# Altium PCB T90MProbojV2.PcbDoc
Units mil, origin at the board's own origin, x right, y up, seen from the top; angles counter-clockwise.
Board outline 5907 x 3150 mil, 2 copper layers (Top Layer, Bottom Layer); 48 components, 36 nets, 183 pads, 31 vias.
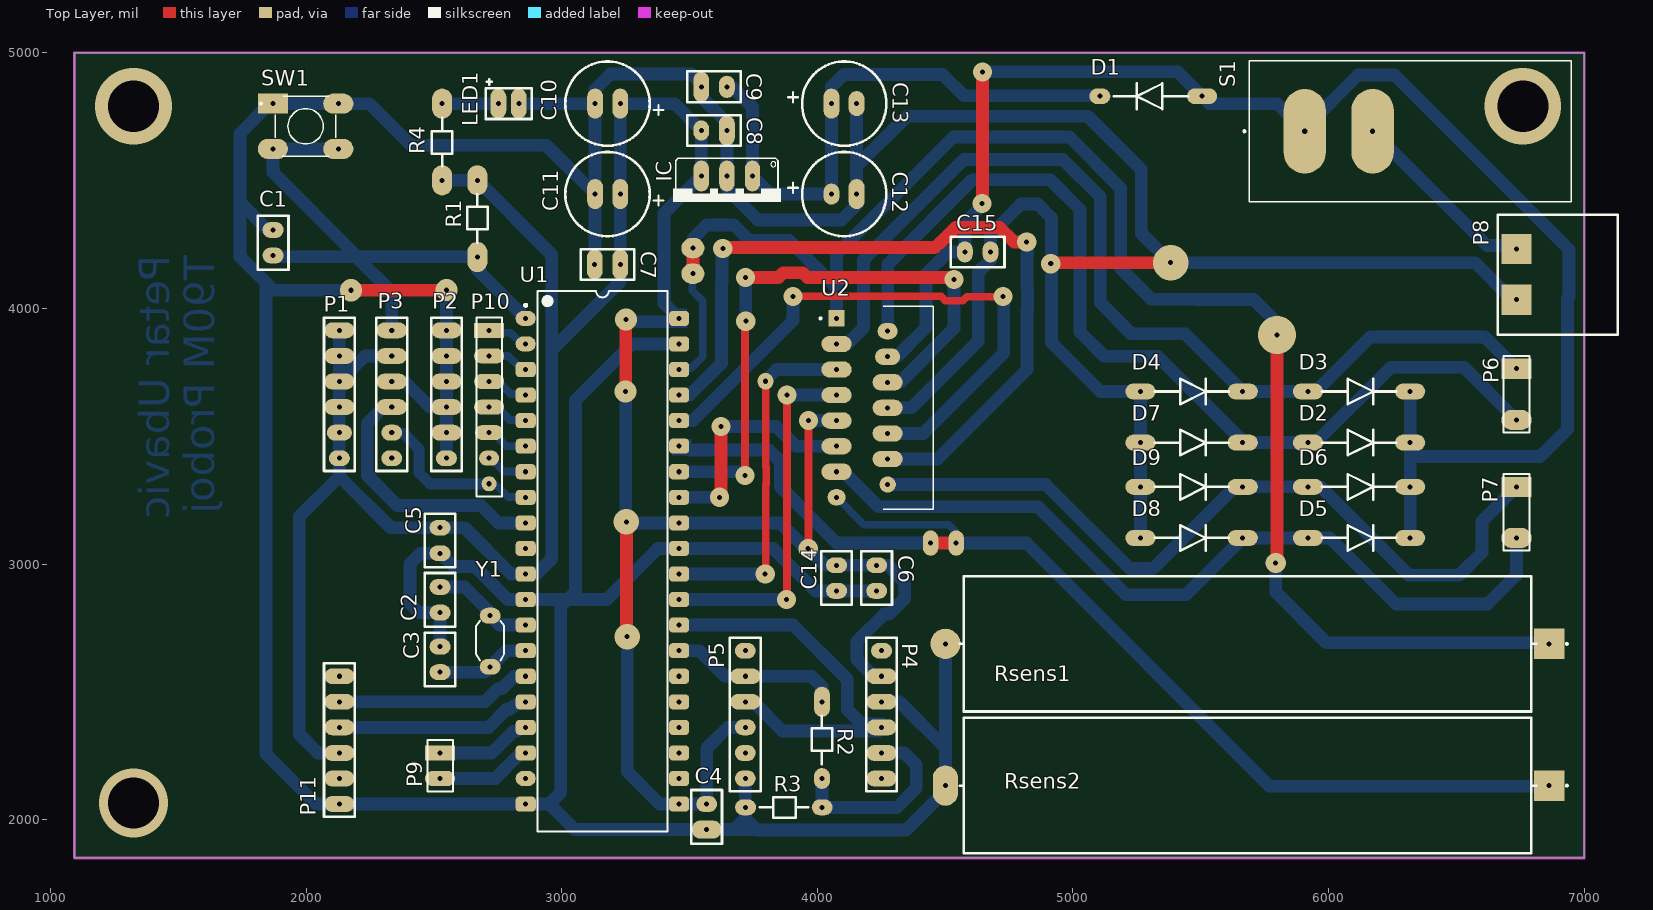
[diagram p0: Top Layer view]
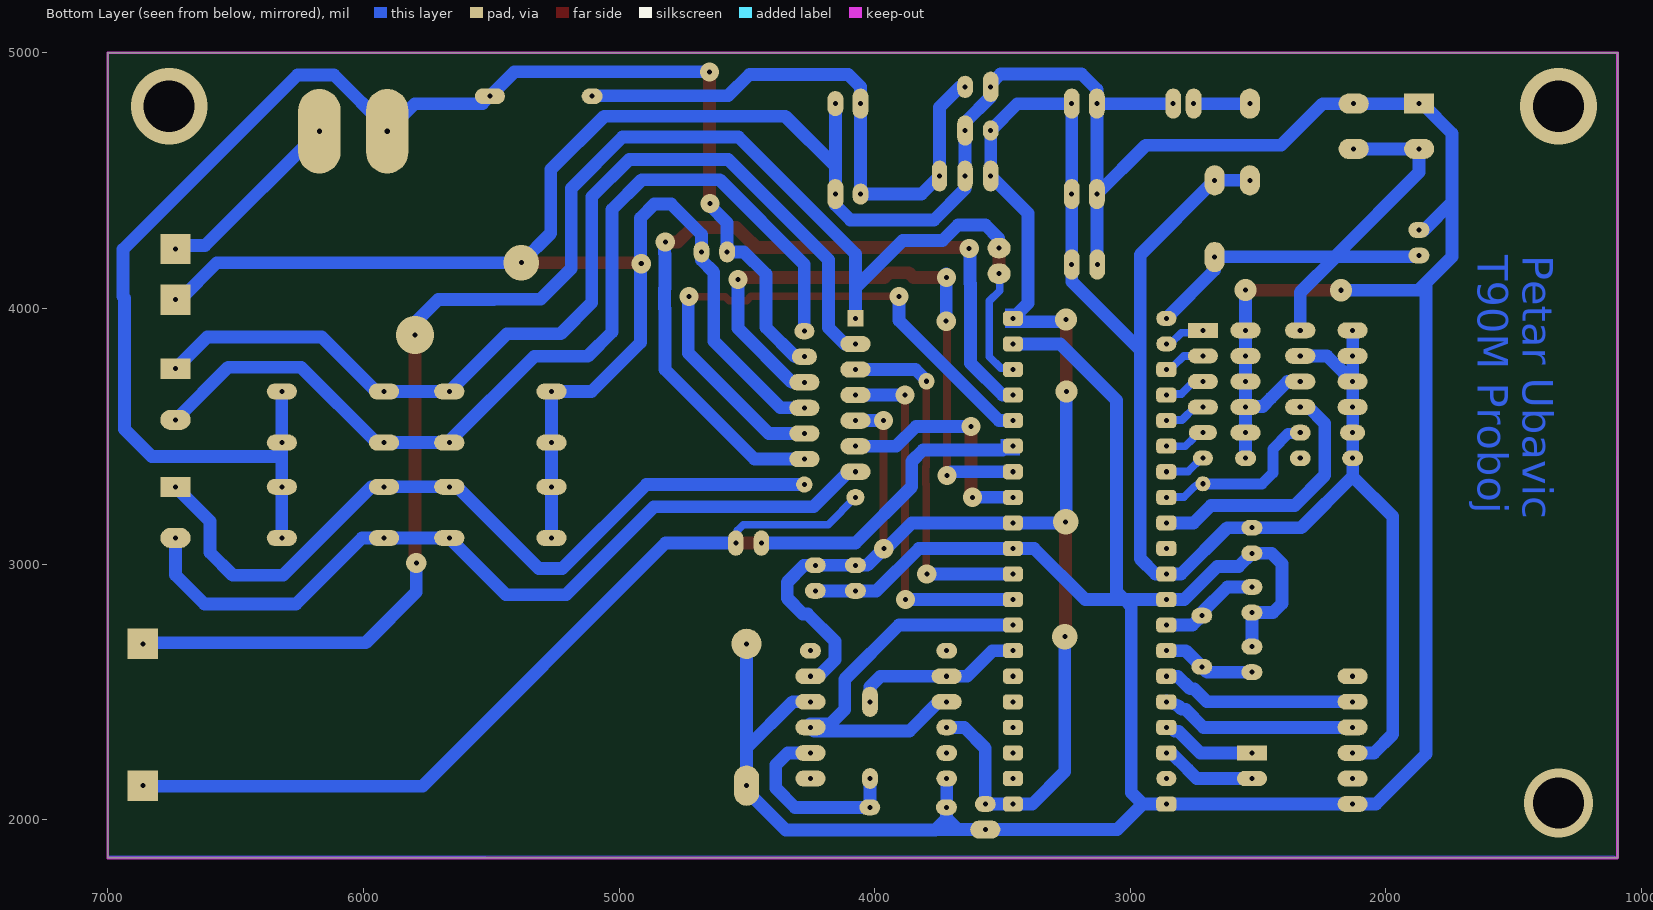
[diagram p1: Bottom Layer view, seen from below]

## Layer stack, top to bottom
Top Solder: solder mask 0.4, Solder Resist, Dk 3.5
Top Layer: signal copper 1.4
Dielectric 1: dielectric 12.6, FR-4, Dk 4.8
Bottom Layer: signal copper 1.4
Bottom Solder: solder mask 0.4, Solder Resist, Dk 3.5

## Board outline
1093,1850 7000,1850 7000,5000 1093,5000

## Design rules (kind name [scope] priority, off if disabled: settings)
Clearance Clearance_1 [InNet('No Net') And OnLayer('Top Layer') vs InNet('No Net') And OnLayer('Top Layer')] p1: gap=10 ignorepadtopadclearanceinfootprint=FALSE
Clearance [All] p2: gap=30 ignorepadtopadclearanceinfootprint=FALSE
PolygonConnect [All] p1: connectstyle=Relief reliefconductorwidth=10 reliefentries=4 polygonreliefangle="90 Angle" airgapwidth=10
RoutingVias [All] p1: holewidth=28 width=50 viastyle="Through Hole" minholewidth=28 minwidth=50 maxholewidth=28 maxwidth=50
SolderMaskExpansion [All] p1: expansion=4 istentingtop=FALSE
Width [All] p1: maxlimit=50 minlimit=30 preferedwidth=43
30 further rules are at their usual default settings.

## Classes and differential pairs
component class Tenk: C1 C2 C3 C4 C5 C6 C7 C8 C9 C10 C11 C12 C13 C14 C15 D1 D2 D3 D4 D5 D6 D7 D8 D9 IC LED1 P1 P2 P3 P4 P5 P6 P7 P8 P9 P10 P11 R1 R2 R3 R4 S1 SW1 U1 Y1

## Components (designator, comment, footprint, x,y, rotation, side; value= is the part's Value field where it differs from the comment)
C1 "Cap" CAP100#1 1871,4257 r270 top value=100nF
C2 "Cap" CAP100#1 2524,2860 r90 top value=33pF
C3 "Cap" CAP100#1 2524,2627 r270 top value=33pF
C4 "Cap" CAP100#2 3567,2011 r90 top value=100nF
C5 "Cap" CAP100#1 2524,3092 r90 top value=100nF
C6 "Cap" CAP100#1 4232,2945 r90 top value=100nF
C7 "Cap" CAP100#3 3179,4172 r0 top value=100nF
C8 "Cap" CAP100#4 3596,4696 r180 top value=100nF
C9 "Cap" CAP100#5 3596,4867 r0 top value=100nF
C10 "Cap Pol1" RAD4#1 3229,4801 r180 top value=470uF
C11 "Cap Pol1" RAD4#1 3229,4447 r180 top value=470uF
C12 "Cap Pol1" RAD4#2 4055,4447 r0 top value=470uF
C13 "Cap Pol1" RAD4#3 4055,4801 r0 top value=470uF
C14 "Cap" CAP100#1 4075,2945 r90 top value=100nF
C15 "Cap" CAP100#1 4627,4221 r180 top value=100nF
D1 "Diode 1N4007" DIODE400#1 5315,4830 r0 top
D2 "Diode 1N5402" DIODE400#2 6109,3475 r180 top
D3 "Diode 1N5402" DIODE400#2 6109,3675 r180 top
D4 "Diode 1N5402" DIODE400#2 5454,3675 r180 top
D5 "Diode 1N5402" DIODE400#2 6109,3102 r180 top
D6 "Diode 1N5402" DIODE400#2 6109,3302 r180 top
D7 "Diode 1N5402" DIODE400#2 5454,3475 r180 top
D8 "Diode 1N5402" DIODE400#2 5454,3102 r180 top
D9 "Diode 1N5402" DIODE400#2 5454,3302 r180 top
IC "L7805" 78XXS 3646,4418 r180 top
LED1 "GREEN" LED_2 2792,4816 r0 top
P1 "5V" HEADER_6#1 2130,3664 r0 top
P2 "GND" HEADER_6#2 2549,3664 r0 top
P3 "Programator" HEADER_6#3 2334.95,3664 r0 top
P4 "Bluetooth" HEADER_6#4 4251,2411 r0 top
P5 "FT232" HEADER_6#5 3718,2411 r0 top
P6 "Motor 1" KLEMA 6735,3659 r270 top
P7 "Motor 2" KLEMA 6735,3197 r270 top
P8 "2EDGRC-5.08-02P-14-00A(H)" PWR_Con 6895,4149 r0 top
P9 "Interrupt" HDR1X2 2524,2261 r270 top
P10 "GPIO" HDR1X7 2716,3914 r270 top
P11 "FT232" HEADER_6#6 2130,2311 r0 top
R1 "Res1" RES400#1 2670,4351 r90 top value=10K
R2 "Res1" RES400#2 4018,2311 r90 top value=4.7K
R3 "Res1" RES400#3 3869,2048 r0 top value=10K
R4 "Res1" RES400#1 2532,4651 r270 top value=1K
Rsens1 "15W" Rsens#1 5681.9,2688 r180 top value=5
Rsens2 "15W" Rsens#2 5681.9,2133 r180 top value=5
S1 "" SW_RB141C1100 6320,4693 r180 top
SW1 "TASTER" SW_1825910-6-4 1997.95,4712.42 r0 top
U1 "DSPIC30F4013-20I/P" PDIP600-P40 3159,3011 r0 top
U2 "L298N" TO127P2020X500X2100-15 4075,3961 r0 top
Y1 "XTAL" OSC_5 2720,2713 r0 top

## Footprints (in the part's own frame and the unit in brackets; to place one, negate y for a bottom-side part, rotate by r counter-clockwise, add the part's x,y. Pads: shape width x height; smd on the part's side, far side on the other; paste and mask are expansions set on the pad)
78XXS [mil]
  oval 60x120 hole 19.68: GND(0,-100) IN(-100,-100) OUT(100,-100)
  silkscreen extent -210,-170 210,0
CAP100#1 [mil]
  oval 62x82 hole 19.68: 1(-50,0) 2(50,0)
  silkscreen extent -105,-60 105,60
CAP100#2 [mil]
  oval 70.87x118.11 hole 19.68: 1(-50,0)
  oval 62x82 hole 19.68: 2(50,0)
  silkscreen extent -105,-60 105,60
CAP100#3 [mil]
  oval 62x118.11 hole 19.68: 1(-50,0) 2(50,0)
  silkscreen extent -105,-60 105,60
CAP100#4 [mil]
  oval 62x118.11 hole 19.68: 1(-50,0)
  oval 62x78.74 hole 19.68: 2(50,0)
  silkscreen extent -105,-60 105,60
CAP100#5 [mil]
  oval 62x118.11 hole 19.68: 1(-50,0)
  oval 62x86.61 hole 19.68: 2(50,0)
  silkscreen extent -105,-60 105,60
DIODE400#1 [mil]
  oval 118.11x62 hole 19.68: 1(190,0)
  oval 82x62 hole 19.68: 2(-210,0)
  silkscreen extent -155,-50 135,50
DIODE400#2 [mil]
  oval 118.11x62 hole 19.68: 1(190,0) 2(-210,0)
  silkscreen extent -155,-50 135,50
HDR1X2 [mm] "Connector; Header; 2 Position"
  rect 1.5x3 hole 0.5: 1(0,0)
  oval 1.5x3 hole 0.5: 2(2.54,0)
  silkscreen extent -1.27,-1.27 3.81,1.27
HDR1X7 [mm] "Connector; Header; 7 Position"
  rect 1.5x3 hole 0.5: 1(0,0)
  oval 1.5x3 hole 0.5: 2(2.54,0) 3(5.08,0) 4(7.62,0)
  oval 1.5x2.8 hole 0.5: 5(10.16,0)
  oval 1.5x2 hole 0.5: 6(12.7,0)
  round 1.5 hole 0.5: 7(15.24,0)
  silkscreen extent -1.27,-1.27 16.51,1.27
HEADER_6#1 [mm]
  oval 3x1.575 hole 0.5: 1(0,6.35) 2(0,3.81) 3(0,1.27) 4(0,-1.27)
  oval 2.5x1.575 hole 0.5: 5(0,-3.81)
  oval 2.083x1.575 hole 0.5: 6(0,-6.35)
  silkscreen extent -1.52,-7.62 1.52,7.62
HEADER_6#2 [mm]
  oval 3x1.575 hole 0.5: 1(0,6.35) 2(0,3.81) 3(0,1.27) 4(0,-1.27) 5(0,-3.81)
  oval 2.083x1.575 hole 0.5: 6(0,-6.35)
  silkscreen extent -1.52,-7.62 1.52,7.62
HEADER_6#3 [mm]
  oval 3x1.575 hole 0.5: 1(0,6.35) 2(0,3.81) 3(0,1.27) 4(0,-1.27)
  oval 2.08x1.575 hole 0.5: 5(0,-3.81)
  oval 2.083x1.575 hole 0.5: 6(0,-6.35)
  silkscreen extent -1.52,-7.62 1.52,7.62
HEADER_6#4 [mm]
  oval 2.083x1.575 hole 0.5: 1(0,6.35)
  oval 3x1.575 hole 0.5: 2(0,3.81) 3(0,1.27) 4(0,-1.27) 5(0,-3.81) 6(0,-6.35)
  silkscreen extent -1.52,-7.62 1.52,7.62
HEADER_6#5 [mm]
  oval 2.083x1.575 hole 0.5: 1(0,6.35) 4(0,-1.27) 5(0,-3.81) 6(0,-6.35)
  oval 3x1.575 hole 0.5: 2(0,3.81) 3(0,1.27)
  silkscreen extent -1.52,-7.62 1.52,7.62
HEADER_6#6 [mm]
  oval 3x1.575 hole 0.5: 1(0,6.35) 2(0,3.81) 3(0,1.27) 4(0,-1.27) 5(0,-3.81) 6(0,-6.35)
  silkscreen extent -1.52,-7.62 1.52,7.62
KLEMA [mm] "Connector; Header; 2 Position"
  rect 2x3 hole 0.5: 1(-2.667,0)
  oval 2x3 hole 0.5: 2(2.413,0)
  silkscreen extent -3.94,-1.27 3.68,1.27
LED_2 [mil]
  oval 62x118.11 hole 19.68: 1(40,-15) 2(-40,-15)
  silkscreen extent -90,-75 90,80, body extent -105,-126 110,106, height 346
OSC_5 [mil]
  oval 82x62 hole 19.68: 1(0,-115) 2(0,85)
  silkscreen extent -55,-90 55,65, body extent -92,-240 92,207, height 138
PDIP600-P40 [mm] "DIP, 40-Leads, Row Spacing 15.24mm, Pitch 2.54mm, Body 51.8x13.5mm"
  oval 2x1.5 hole 0.5: 1(-7.62,24.13) 2(-7.62,21.59) 19(-7.62,-21.59)
  rrect50% 2x1.5 hole 0.5: 3(-7.62,19.05) 4(-7.62,16.51) 5(-7.62,13.97) 6(-7.62,11.43) 7(-7.62,8.89) 8(-7.62,6.35) 9(-7.62,3.81) 10(-7.62,1.27) 11(-7.62,-1.27) 12(-7.62,-3.81) 13(-7.62,-6.35) 14(-7.62,-8.89) 15(-7.62,-11.43) 16(-7.62,-13.97) 17(-7.62,-16.51) 18(-7.62,-19.05) 20(-7.62,-24.13) 21(7.62,-24.13) 22(7.62,-21.59) 23(7.62,-19.05) 24(7.62,-16.51) 25(7.62,-13.97) 26(7.62,-11.43) 27(7.62,-8.89) 28(7.62,-6.35) 29(7.62,-3.81) 30(7.62,-1.27) 31(7.62,1.27) 32(7.62,3.81) 33(7.62,6.35) 34(7.62,8.89) 35(7.62,11.43) 36(7.62,13.97) 37(7.62,16.51) 38(7.62,19.05) 39(7.62,21.59) 40(7.62,24.13)
  silkscreen extent -7.74,-26.85 6.45,26.85, body extent -7.3,-26.85 7.3,26.85, height 6.35
PWR_Con [mm]
  rect 3x3 hole 0.5: 1(-4.064,-2.921) 2(-4.064,2.108)
  silkscreen extent -5.94,-6.43 5.99,5.5, body extent -6.07,-6.51 5.93,5.65, height 8.73
RAD4#1 [mm]
  oval 1.575x3 hole 0.5: 1(0,0) 2(2.5,0)
  silkscreen extent -4.32,-4.19 5.46,4.19
RAD4#2 [mm]
  oval 1.575x2.083 hole 0.5: 1(0,0)
  oval 1.575x3 hole 0.5: 2(2.5,0)
  silkscreen extent -4.32,-4.19 5.46,4.19
RAD4#3 [mm]
  oval 1.575x3 hole 0.5: 1(0,0)
  oval 1.575x2.5 hole 0.5: 2(2.5,0)
  silkscreen extent -4.32,-4.19 5.46,4.19
RES400#1 [mm]
  oval 3x2 hole 0.5: 1(-3.81,0) 2(3.81,0)
  silkscreen extent -2.41,-1.02 2.41,1.02
RES400#2 [mm]
  oval 2.083x1.575 hole 0.5: 1(-3.81,0)
  oval 3x1.575 hole 0.5: 2(3.81,0)
  silkscreen extent -2.41,-1.02 2.41,1.02
RES400#3 [mm]
  oval 2.083x1.575 hole 0.5: 1(-3.81,0) 2(3.81,0)
  silkscreen extent -2.41,-1.02 2.41,1.02
Rsens#1 [mm]
  rect 3x3 hole 0.5: 1(-30,0)
  round 3 hole 0.5: 2(30,0)
  silkscreen extent -31.85,-6.73 28.57,6.73
Rsens#2 [mm]
  rect 3x3 hole 0.5: 1(-30,0)
  oval 2.5x4 hole 0.5: 2(30,0)
  silkscreen extent -31.85,-6.73 28.57,6.73
SW_1825910-6-4 [mm]
  rect 3x2 hole 0.5: 1(-3.25,2.25)
  oval 3x2 hole 0.5: 2(3.25,2.25) 3(-3.25,-2.25) 4(3.25,-2.25)
  silkscreen extent -4.54,-3 3,3
SW_RB141C1100 [mm]
  oval 4.2x8.4 hole 0.5: 1(10.5,0) 2(3.757,0)
  silkscreen extent -16,-7 16.6,7, body extent -16.35,-7 16.35,7, height 24.57
TO127P2020X500X2100-15 [mm]
  rect 1.62x1.62 hole 0.5: 1(0,0)
  oval 2x1.62 hole 0.5: 2(5.08,-1.27)
  oval 3x1.62 hole 0.5: 3(0,-2.54) 5(0,-5.08) 6(5.08,-6.35) 7(0,-7.62) 8(5.08,-8.89) 9(0,-10.16) 10(5.08,-11.43) 11(0,-12.7) 12(5.08,-13.97) 13(0,-15.24)
  oval 2.5x1.62 hole 0.5: 4(5.08,-3.81)
  round 1.62 hole 0.5: 14(5.08,-16.51)
  oval 1.8x1.62 hole 0.5: 15(0,-17.78)
  silkscreen extent -1.69,-18.99 9.63,1.21

## Part data
C1 C2 C3 C4 C5 C6 C7 C8 C9 C14 C15: "Capacitor", LatestRevisionDate=17-Jul-2002, LatestRevisionNote="Re-released for DXP Platform.", PackageDescription="Radial Cap, Thru-Hole; 2 Leads; 0.3 in Pin Spacing", PackageReference=RAD-0.3, Published=8-Jun-2000, Publisher="Altium Limited"
C10 C11 C12 C13: "Polarized Capacitor (Radial)", LatestRevisionDate=17-Jul-2002, LatestRevisionNote="Re-released for DXP Platform.", PackageDescription="Polarized Capacitor (Radial); 2 Leads", PackageReference=RB7.6-15, Published=8-Jun-2000, Publisher="Altium Limited"
D1: "1 Amp General Purpose Rectifier", Code_JEDEC=DO-204-AL, ComponentLink1Description="Manufacturer Link", ComponentLink1URL=http://www.fairchildsemi.com/, ComponentLink2Description=Datasheet, ComponentLink2URL=http://www.fairchildsemi.com/ds/1N%2F1N4001.pdf, DatasheetVersion=1998, LatestRevisionDate=17-Jul-2002, LatestRevisionNote="Re-released for DXP Platform.", PackageDescription="Diode, Axial; Body 5.2 x 2.7 mm (LxDia. max), Lead Dia. 0.86 mm (max)", PackageReference=DO-41, PackageVersion=Aug-1999, Published=8-Jun-2000, Publisher="Altium Limited"
D2 D3 D4 D5 D6 D7 D8 D9: "3 Amp General Purpose Rectifier", ComponentLink1Description="Manufacturer Link", ComponentLink1URL=http://www.fairchildsemi.com/, ComponentLink2Description=Datasheet, ComponentLink2URL=http://www.fairchildsemi.com/ds/1N%2F1N5400.pdf, DatasheetVersion=1998, LatestRevisionDate=17-Jul-2002, LatestRevisionNote="Re-released for DXP Platform.", PackageDescription="Diode, Axial; Body 9.5 x 5.6 mm (LxDia. max), Lead Dia. 1.32 mm (max)", PackageReference=DO-201AD, PackageVersion=Aug-1999, Published=8-Jun-2000, Publisher="Altium Limited"
IC: "Linear Voltage Regulator IC 1 Output 1.5A D2PAK", Package="TO-263-3 Inchange Semiconductor", Availability=Unavailable, MF=STMicroelectronics, MP=L7805, Price=None, SnapEDA_Link=https://www.snapeda.com/parts/L7805/STMicroelectronics/view-part/563125/?ref=snap
LED1: library part LED1, "Typical RED GaAs LED", LatestRevisionDate=08-Jul-2005, LatestRevisionNote="Mech Layer 1 removed.", PackageDescription="LED; 2 Leads", PackageReference=LED-1, Published=8-Jun-2000, Publisher="Altium Limited"
P1 P2 P3 P4 P5 P11: library part "Header 6", "Header, 6-Pin", LatestRevisionDate=17-Jul-2002, LatestRevisionNote="Re-released for DXP Platform.", Publisher="Altium Limited"
P6 P7 P9: library part "Header 2", "Header, 2-Pin", LatestRevisionDate=17-Jul-2002, LatestRevisionNote="Re-released for DXP Platform.", Publisher="Altium Limited"
P8: library part 00000002, "TERM BLOCK HDR 2POS 90DEG 5.08MM", Manufacturer Part Number=2EDGRC-5.08-02P-14-00A(H), Price=0.1304, Suplier=TME, Suplier Product Link=https://www.tme.eu/en/details/2edgrc5.08-2p14/pluggable-terminal-blocks/degson-electronics/2edgrc-508-02p-14-00ah/
P10: library part "Header 7", "Header, 7-Pin", LatestRevisionDate=17-Jul-2002, LatestRevisionNote="Re-released for DXP Platform.", Publisher="Altium Limited"
R1 R2 R3 R4: "Resistor", LatestRevisionDate=17-Jul-2002, LatestRevisionNote="Re-released for DXP Platform.", PackageDescription="Axial Device, Thru-Hole; 2 Leads; 0.3 in Pin Spacing", PackageReference=AXIAL-0.3, Published=8-Jun-2000, Publisher="Altium Limited"
Rsens1 Rsens2: library part Res1, "Resistor", LatestRevisionDate=17-Jul-2002, LatestRevisionNote="Re-released for DXP Platform.", PackageDescription="Axial Device, Thru-Hole; 2 Leads;", Published=8-Jun-2000, Publisher="Altium Limited"
S1: library part RB141C1100, "Rocker Switches 15A 125VAC, OFF-ON, Black Rocker, No Markings", Package=None, Availability="In Stock", Check_prices=https://www.snapeda.com/parts/RB141C1100/ITC/view-part/?ref=eda, MF="e-switch inc", MP=RB141C1100, Price=None, Purchase-URL=https://pricing.snapeda.com/search/part/RB141C1100/?ref=eda, SnapEDA_Link=https://www.snapeda.com/parts/RB141C1100/ITC/view-part/?ref=snap
SW1: library part 1825910-6, "Switch Tactile OFF (ON) SPST Round Button PC Pins 0.05A 24VDC 100000Cycles 1.57N Thru-Hole Loose", Package=None, Availability=Unavailable, MP=1825910-6, Price=None
U1: "High-Performance 16-bit Digital Signal Controller, 48 KB Flash, 2 KB SRAM, 1 KB EEPROM, 40-Pin PDIP, Industrial Temperature", Supplier Part Number 1=DSPIC30F4013-20IP-ND, ComponentLink1Description=Datasheet, ComponentLink1URL=http://ww1.microchip.com/downloads/en/DeviceDoc/70138F.pdf, ComponentLink2Description="Packaging Specification", ComponentLink2URL=http://www.microchip.com/stellent/groups/techpub_sg/documents/packagingspec/en012702.pdf, ComponentLink3Description="Microchip.com Home", ComponentLink3URL=http://www.microchip.com/, DatasheetVersion="revF, Apr-2008", PackageDescription="40-Lead Plastic Dual In-Line (P) - 600 mil Body [PDIP]", PackageReference=PDIP600-P40, PackageVersion="revBB, Aug-2009", Published=29-Jan-2009, Publisher="Altium Limited", Supplier 1=Digi-Key, Supplier 2=Farnell, Supplier Part Number 2=1439755
U2: "Dual Full Bridge Motor Driver 15-Pin(15+Tab) MULTIWATT V Tube", Package=None, Availability=Unavailable, MP=L298N, Price=None
Y1: "Crystal Oscillator", LatestRevisionDate=17-Jul-2002, LatestRevisionNote="Re-released for DXP Platform.", PackageDescription="Crystal, Thru-Hole; 2 Leads; Body 3.1 x 8.2 mm (Dia.xH)", PackageReference=R38, Published=8-Jun-2000, Publisher="Altium Limited"

## Free pads (board coordinates)
  oval 90x80 hole 19.68: 4(3513,4236) 5(3513,4136)
  oval 60x99.37 hole 19.68: 6(4443,3082) 7(4543,3082)

## Via types
v1: diameter 75, hole 19.68, Top Layer to Bottom Layer, 18 vias
v2: diameter 86.61, hole 19.68, Top Layer to Bottom Layer, 4 vias
v3: diameter 300, hole 200, Top Layer to Bottom Layer, 2 vias
v4: diameter 100, hole 19.68, Top Layer to Bottom Layer, 2 vias
v5: diameter 62.99, hole 19.68, Top Layer to Bottom Layer, 1 vias
v6: diameter 150, hole 19.68, Top Layer to Bottom Layer, 1 vias
v7: diameter 78.74, hole 19.68, Top Layer to Bottom Layer, 1 vias
v8: diameter 140, hole 19.68, Top Layer to Bottom Layer, 1 vias
v9: diameter 270, hole 200, Top Layer to Bottom Layer, 1 vias

## Nets (pads, with @x,y where several pads share a name; then routed paths per layer and width w, separated by ;. In a path a pad name is that pad's centre, name@x,y a point inside that pad or via, vN(x,y) a via of type N, cw(c..) or ccw(c..) an arc to the next point about the centre after c; other vN are vias at no path point)
+5: C4.2 C5.2 C6.2 C7.2 C8.2 C10.1 C11.1 C14.2 IC.OUT P1.1 P1.2 P1.3 P1.4 P1.5 P1.6 P3.2 P4.2 P5.4 P11.4 R1.2 R4.2 U1.11 U1.21 U1.32 U1.40 U2.9 | length 12172.6
  Top Layer w30: v1@3965,3061 v1(3965,3561)
  Top Layer w50: v2(3250,3675) 3250,3955.44 v2(3251.18,3956.62) ; v4(3253,3165) 3253,2719 v4(3256,2716) ; v1(3964,3060) v1@3965,3061
  Bottom Layer w50: P11.4 2046,2261 1973,2334 1973,3185.86 2130,3342.86 ; P1.1 P1.2 P1.3 ; P3.2 2230,3814 2160.35,3744.35 2160.35,3719.54 2154.81,3714 P1.3 ; R4.2 R1.2 2961,4210 2961,3848 ; v2(3250,3675) 3250,3168 v4(3253,3165) 3257,3161 U1.32 3855,3161 3956,3060 v1(3964,3060) 4029,2995 C14.2 C6.2 4276,2995 4342,2929 4342,2866 4281,2805 4262,2805 4155,2698 4155,2625.38 4219.38,2561 P4.2 ; v2(3251.18,3956.62) 3261.09,3956.62 3269.71,3948 3421.11,3948 3429.58,3956.47 3454.47,3956.47 U1.40 U1.40@3446.55,3973.45 ; v4(3256,2716) 3256,2188 3383,2061 U1.21 C4.2 3567,2279 3649,2361 P5.4 ; U1.40@3446.55,3965.53 3444.63,3965.53 3444.63,3975.37 3400,4020 3400,4372 IC.OUT C8.2 3441,4801 C10.1 C11.1 C7.2 3229,4105 2972,3848 2961,3848 ; v1@3966,3561 U2.9 ; 2130,3342.86 2330.86,3142 C5.2 2620.76,3142 2801.76,2961 U1.11 2901,2961 2961,3021 2961,3848 ; 2130,3342.86 P1.6 P1.5 P1.4 P1.3
GND: C1.1 C2.1 C3.1 C4.1 C5.1 C6.1 C7.1 C8.1 C9.1 C10.2 C11.2 C12.2 C13.2 C14.1 C15.1 D4.1 D7.1 D8.1 D9.1 IC.GND LED1.1 P2.1 P2.2 P2.3 P2.4 P2.5 P2.6 P3.3 P4.3 P5.6 P8.1 P11.6 R3.1 Rsens1.2 Rsens2.2 SW1.1 SW1.2 U1.12 U1.20 U1.31 U1.39 U2.8 | length 23576.5
  Top Layer w50: v2(2176,4071) 2548,4071 v2(2549,4072) ; v1(4913,4175) 4917,4179 v8(5382,4179)
  Bottom Layer w50: C1.1 1850,4307 1741,4416 ; v2(2176,4071) 1872,4071 1843,4100 ; P3.3 2384.63,3714 2449.01,3649.62 2449.01,3649.29 2482,3616.3 2546.7,3616.3 P2.4 ; C3.1 C2.1 2442,2810 2406,2846 2406,3001 2447,3042 C5.1 2576,2990 2659.62,2990 2788.62,2861 U1.12 3023,2861 ; P2.6 P2.5 P2.4 ; v2(2549,4072) P2.1 P2.2 P2.3 P2.4 ; LED1.1@2838,4801 C10.2 ; C7.1 3130.57,4173.57 C11.2 ; U1.39 3274,3861 3054,3641 3054,2892 3023,2861 ; R3.1@3718,2048 P5.6 ; R3.1 3719,2006 3718,2005 ; C13.2 4153.43,4556 ; C6.1 C14.1 4074,2894 3994,2894 3827,3061 U1.31 3376,3061 3176,2861 3023,2861 ; P4.3 4320,2461 4500.8,2280.2 ; U2.8 4368,3611 4629,3872 4629,4141.38 4677,4189.38 C15.1 4677,4289 4796,4408 4862,4408 4916,4354 v1@4916,4178 ; Rsens1.2@4500.8,2713 Rsens1.2 4500.8,2280.2 ; v1(4913,4175) v1@4916,4178 ; D8.1 D9.1 D7.1 D4.1 5108,3675 4916,3867 v1@4916,4178 ; P8.1 6717.97,4034 6572.97,4179 v8(5382,4179) 5267,4294 5267,4543 5058,4752 4349.43,4752 4153.43,4556 ; 1741,4416 1741,4683.95 1858.05,4801 SW1.1 SW1.2 2247,4801 2410,4638 2939.57,4638 C11.2 ; 1741,4416 1741,4202 1843,4100 ; 1843,4100 1843,2257 2039,2061 P11.6 U1.20 2951,2061 ; 2951,2061 2996,2106 2996,2834 3023,2861 ; 2951,2061 3051,1961 C4.1 3674,1961 3718,2005 ; C11.2 C10.2 ; C10.2 3130.57,4856.39 3191.19,4917 3508,4917 3546,4879 C9.1 3546,4827.62 3646,4727.62 C8.1 IC.GND 3646,4467.79 3767.79,4346 4095,4346 4153.43,4404.43 C12.2 4153.43,4556 ; 3718,2005 3763,1960 4348,1960 4501,2113 4501,2280 4500.8,2280.2
INT0: P9.1 U1.17 | length 376.4
  Bottom Layer w50: P9.1 2726.32,2261 2810.85,2345.53 2825.42,2345.53 2840.9,2361 U1.17
INT2: P9.2 U1.18 | length 376.8
  Bottom Layer w50: P9.2 2740.14,2161 2774.47,2195.34 2774.47,2196.01 2839.46,2261 U1.18
MCLR: C1.2 P3.1 R1.1 SW1.3 SW1.4 U1.1 | length 2276.2
  Bottom Layer w50: C1.2 1875.58,4202.42 2195.42,4202.42 ; SW1.4 SW1.3 1870,4532.42 2195.42,4207 ; P3.1 2334.95,4062.88 2195.42,4202.42 ; U1.1@2854.42,3956.42 2854.42,3965.58 2670,4150 R1.1 2668.58,4202.42 2195.42,4202.42
NetC9_2: C9.2 C12.1 C13.1 D1.2 IC.IN | length 2264.8
  Bottom Layer w50: C9.2 3666,4867 3746,4787 IC.IN 3817,4447 C12.1 C13.1 4055,4867 4103,4915 4490,4915 4573,4832 D1.2@5105,4832
NetLED1_1: LED1.2 R4.1 | length 214
  Bottom Layer w50: R4.1 LED1.2@2746,4801
NetP4_5: P4.5 R2.1 R3.2 | length 758.9
  Bottom Layer w50: R2.1 4018,2048 R3.2 4311,2048 4387,2124 4387,2214 4340,2261 P4.5
NetP8_2: P8.2 S1.2 | length 753.9
  Bottom Layer w50: S1.2 6619.05,4246.05 6720.95,4246.05 P8.2
OSC1: C2.2 U1.13 Y1.2 | length 403.7
  Bottom Layer w50: C2.2 2620,2910 2720,2810 Y1.2 2757,2761 U1.13
OSC2: C3.2 U1.14 Y1.1 | length 369.8
  Bottom Layer w50: C3.2 2699,2577 Y1.1 2783,2661 U1.14
OUT1: D2.1 D7.2 P6.2 U2.2 | length 3775
  Bottom Layer w50: U2.2 4275,4172 4606,4503 4911,4503 5027,4387 5027,3908 5122,3813 5331,3813 5664,3480 D7.2 D2.1 5949,3475 6244,3770 6529,3770 P6.2
OUT2: D3.1 D4.2 P6.1 U2.3 | length 3872.9
  Bottom Layer w50: U2.3 4116.56,3861 4180,3924.44 4180,4190.14 4572.86,4583 4960,4583 5107,4436 5107,4022 5228,3901 5438,3901 D4.2 D3.1 5950,3675 6163,3888 6611,3888 P6.1
OUT3: D5.1 D8.2 P7.2 U2.13 | length 3249.9
  Bottom Layer w50: U2.13 4102.12,3361 4239.01,3224.11 4862.89,3224.11 5207,2880 5442,2880 D8.2 D5.1 6005.86,3102 6263.86,2844 6622,2844 6735,2957 P7.2
OUT4: D6.1 D9.2 P7.1 U2.14 | length 3086.9
  Bottom Layer w50: U2.14 4893,3311 5222,2982 5314,2982 5634,3302 D9.2 D6.1 5968,3302 6314,2956 6511,2956 6600,3045 6600,3167 P7.1
PGC: P3.5 P10.7 U1.8 | length 683.7
  Bottom Layer w30: P10.7 2721.56,3308.44 2742.1,3308.44 2748.24,3302.3 2749.7,3302.3 2790,3262 2858,3262 U1.8
  Bottom Layer w43: P3.5 2338.59,3510.36 2382.32,3510.36 2441.98,3450.71 2441.98,3357.02 2485,3314 P10.7
PGD: P3.4 U1.9 | length 1022.4
  Bottom Layer w50: P3.4 2303.33,3614 2238.95,3549.62 2238.95,3347.05 2356.53,3229.47 2684.53,3229.47 2753,3161 U1.9
PWM1: U1.34 U2.6 | length 2460.4
  Top Layer w30: v1(3717,3346) 3717,3947 v1(3720,3950) ; v1@4527,4121 v1(4535,4113)
  Top Layer w50: v1(3719,4121) 3719,4134 3732,4121 3847.81,4121 3866.5,4139.69 3943.13,4139.69 3961.81,4121 v1@4527,4121
  Bottom Layer w50: U1.34 3700,3361 3715,3346 v1(3717,3346) ; v1(3719,4121) 3719,4134 3720,4135 v1(3720,3950) ; U2.6 4324,3711 4535,3922 v1(4535,4113)
PWM2: U1.33 U2.11 | length 922.1
  Top Layer w50: v1(3617,3261) 3623,3267 v1(3623,3538.5)
  Bottom Layer w50: U1.33 v1(3617,3261) ; v1(3623,3538.5) 3838.5,3538.5 3916,3461 U2.11
RB0: P10.1 U1.2 | length 165
  Bottom Layer w30: P10.1 2724.73,3905.27 2799.49,3905.27 2843.76,3861 U1.2
RB1: P10.2 U1.3 | length 165
  Bottom Layer w30: P10.2 2716.08,3813.92 2790.84,3813.92 2829.23,3775.53 2844.47,3775.53 U1.3
RB2: P10.3 U1.4 | length 165
  Bottom Layer w30: P10.3 2750.93,3714 2799.52,3665.41 2854.59,3665.41 U1.4
RB3: P10.4 U1.5 | length 165
  Bottom Layer w30: P10.4 2746.99,3614 2797.55,3563.44 2856.56,3563.44 U1.5
RB4: P10.5 U1.6 | length 166.4
  Bottom Layer w30: P10.5 2733.73,3514 2756.12,3491.61 2756.12,3489.12 2784.24,3461 U1.6
RB5: P10.6 U1.7 | length 165
  Bottom Layer w30: P10.6 2721.4,3414 2773.2,3362.2 2857.8,3362.2 U1.7
RB9: pad.4 pad.5 Rsens1.1 U1.38 U2.1 | length 6144.8
  Top Layer w50: pad.5 pad.4 ; v7(5793,3004) 5791,3006 5798,3013 v6(5798,3896)
  Bottom Layer w30: U1.38 3463.33,3765.33 3505.67,3765.33 3551,3810.67 3551,4029 3511,4069 3511,4134 pad.5
  Bottom Layer w50: pad.4 3514.91,4237.91 3514.91,4274.62 3566.79,4326.5 3674.15,4326.5 3734.65,4266 3890,4266 4075,4081 ; U2.1 4075,4081 ; v7(5793,3004) 5793,2890 5991,2692 6842,2692 Rsens1.1@6863,2713 ; v6(5798,3896) 5798,3944 5707,4035 5490,4035 5489,4036 5307,4036 5187,4156 5187,4469.14 4986.14,4670 4532.14,4670 4075,4212.86 4075,4081
RB10: U1.37 U2.12 | length 3108.1
  Top Layer w50: v1(3630,4234) 3634,4238 4460.38,4238 4481.38,4259 4482.38,4258 4541.38,4317 4712.62,4317 4770.62,4259 4771.62,4260 v1(4819,4260)
  Bottom Layer w50: U1.37 3500.33,3661 3625,3785.67 3625,4096.5 3626.5,4098 3626.5,4230.5 v1(3630,4234) ; U2.12 4470,3411 4820.5,3761.5 4820.5,3999.69 4821.5,4000.69 4821.5,4077.31 4820.5,4078.31 4820.5,4213.31 4821.5,4214.31 4821.5,4257.5 v1(4819,4260)
RB11: U1.36 U2.10 | length 2343
  Top Layer w30: v1(3904.81,4047.19) 4484.14,4047.19 4500.83,4030.5 4569.17,4030.5 4584.67,4046 v1(4726,4046)
  Bottom Layer w50: U1.36 3513.46,3561 3904.81,3952.35 v1(3904.81,4047.19) ; U2.10 4414,3511 4729,3826 4729,4043 v1(4726,4046)
RB12: pad.6 pad.7 Rsens2.1 U1.35 U2.15 | length 4583.1
  Top Layer w50: pad.6 pad.7
  Bottom Layer w30: U2.15 4182,3154 4514.1,3154 4537.26,3130.84 4537.26,3087.74 pad.7
  Bottom Layer w50: U1.35 3463.53,3456.47 3488.42,3456.47 3498.89,3446 3811,3446 3855,3402 3855,3302 4075,3082 pad.6 pad.6@4442,3081 ; pad.7 4818,3082 5769,2131 6861,2131 Rsens2.1
RF0: U1.30 U2.5 | length 1393.1
  Top Layer w30: v5(3797,3715) 3799.5,3712.5 3799.5,3696.17 3798.5,3695.17 3798.5,3381.17 3799.5,3380.17 3799.5,3311.83 3798.5,3310.83 v1@3798.5,2963.5
  Top Layer w50: v1(3796,2961) v1@3798.5,2963.5
  Bottom Layer w50: U1.30 v1(3796,2961) ; v5(3797,3715) 3797,3718 3840,3761 U2.5
RF1: U1.29 U2.7 | length 1412.8
  Top Layer w30: v1@3881,2863 v1(3881,3661)
  Top Layer w50: v1(3879,2861) v1@3881,2863
  Bottom Layer w50: U1.29 v1(3879,2861) ; v1@3883,3661 U2.7
U1ARX: P11.3 U1.16 | length 766.4
  Bottom Layer w50: P11.3 2713.19,2361 2784.19,2432 2798.76,2432 2812.29,2445.53 U1.16@2857.72,2464.13
U1ATX: P11.2 U1.15 | length 770.4
  Bottom Layer w50: P11.2 2700.05,2461 2751.05,2512 2765.62,2512 2814.62,2561 U1.15
U2RX: P4.4 P5.3 U1.28 | length 1621.1
  Bottom Layer w50: U1.28 3905,2761 4117,2549 4117,2431 4173,2375 4251,2375 P4.4 4237,2347 4053.68,2347 4053.62,2346.94 3982.38,2346.94 3982.32,2347 3863.62,2347 3749.62,2461 P5.3
U2TX: P5.2 R2.2 U1.27 | length 676.3
  Bottom Layer w50: U1.27 3539,2661 3639,2561 P5.2 3976.86,2561 4018,2519.86 R2.2
VCC: C15.2 D1.1 D2.2 D3.2 D5.2 D6.2 S1.1 U2.4 | length 6033.2
  Top Layer w50: v1(4644,4410) 4644,4409 4646,4411 v1@4646,4915
  Bottom Layer w50: U2.4 4310.86,3811 4425,3925.14 4425,4134.14 4511.86,4221 C15.2 4577,4335 4644,4402 v1(4644,4410) ; v1@4646,4915 4657,4926 5409,4926 D1.1 5534,4801 5798.61,4801 S1.1 5906.61,4704.89 6115.07,4913.35 6257.65,4913.35 6940,4231 6940,4046.22 6934,4040.22 6934,3527 6828,3421 6319,3421 ; D5.2 D6.2 6319,3421 ; D3.2 D2.2 6319,3421
  other v1: 4646,4925
pads on no net: P3.6 P4.1 P4.6 P5.1 P5.5 P11.1 P11.5 U1.10 U1.19 U1.22 U1.23 U1.24 U1.25 U1.26
copper on no net:
  other v3: 1325,4791 6760,4791
  other v9: 1325,2065

## Polygon pours and split planes (outlines as drawn)
no net on Bottom Layer "NONET_L02_P002" (solid, pour order 2): 1098,1849 1106,1857 6996,1857
no net on Bottom Layer "NONET_L02_P000" (solid, pour order 0): 1097,1848 1099,1850 7000,1850 7000,5000 6998,5002 1095,5002

## Keep-outs
Keep-Out Layer:
  lines w10: 1094,1850 1094,5000 7000,5000 7000,1850 1094,1850

## Other copper
Bottom Layer:
  rectangle net GND: 3677,1936 3760,1985
  rectangle net +5: 3424,3924 3490,3999
  rectangle net RB12: 3432,3424 3507,3490
  pour cut-out: 1095,1846 1099,1850 7000,1850 7000,5000 6998,5002 1095,5002
  text "Petar Ubavic / T90M Proboj" at 1641,4207 h118.11 r90

## Text inside footprints (layer, text, board x,y; h text height)
IC: Mechanical 13 "-" at 3671.01,4568.08 h50.03 r180; Mechanical 13 "I" at 3771.16,4568.19 h50.06 r180; Mechanical 13 "O" at 3570.94,4568.12 h50.04 r180